# EAGLE board Joystick (EAGLE 8.2.2)

No outline drawn. Coordinates in mm, seen from the top.
Copper layers (1*16): Top 0.035mm / dielectric 1.5mm / Bottom 0.035mm
Design rules "default": minimum track width 6mil, minimum drill 0.35mm, track to track 6mil, track to pad 6mil, pad to pad 6mil, via to via 6mil, smd to smd 6mil, copper to edge 40mil, drill to drill 6mil, minimum pad ring 10mil, minimum via ring 8mil, stop-mask expansion 4mil, vias tented up to drill 0mil, thermal gap 10mil

## Footprints (pad centres in the part's own frame; a part is rotated, then mirrored left to right if it is on the bottom)
JOYSTICK-PST-WGCD = drill 0.6 square: +5V 0.97,16.04; GND 0.97,18.58; SW 0.97,8.42; VRX 0.97,13.5; VRY 0.97,10.96 | drill 1.397 pad 2.54: MOUNT1 24.73,7.732; MOUNT2 24.73,21.067; MOUNT3 9.49,21.067; MOUNT4 9.49,7.732 | hole 3: 31.4,2.8; 31.4,23.3; 3.4,2.8; 3.4,23.3

## Placement (x,y rotation side)
U$1  JOYSTICK-PS2-WGCD  [JOYSTICK-PST-WGCD]  0,0 0 top

## Library data of the parts
U$1 = CMU-ArtFab